# EAGLE board 010rele quad (EAGLE 5.11)
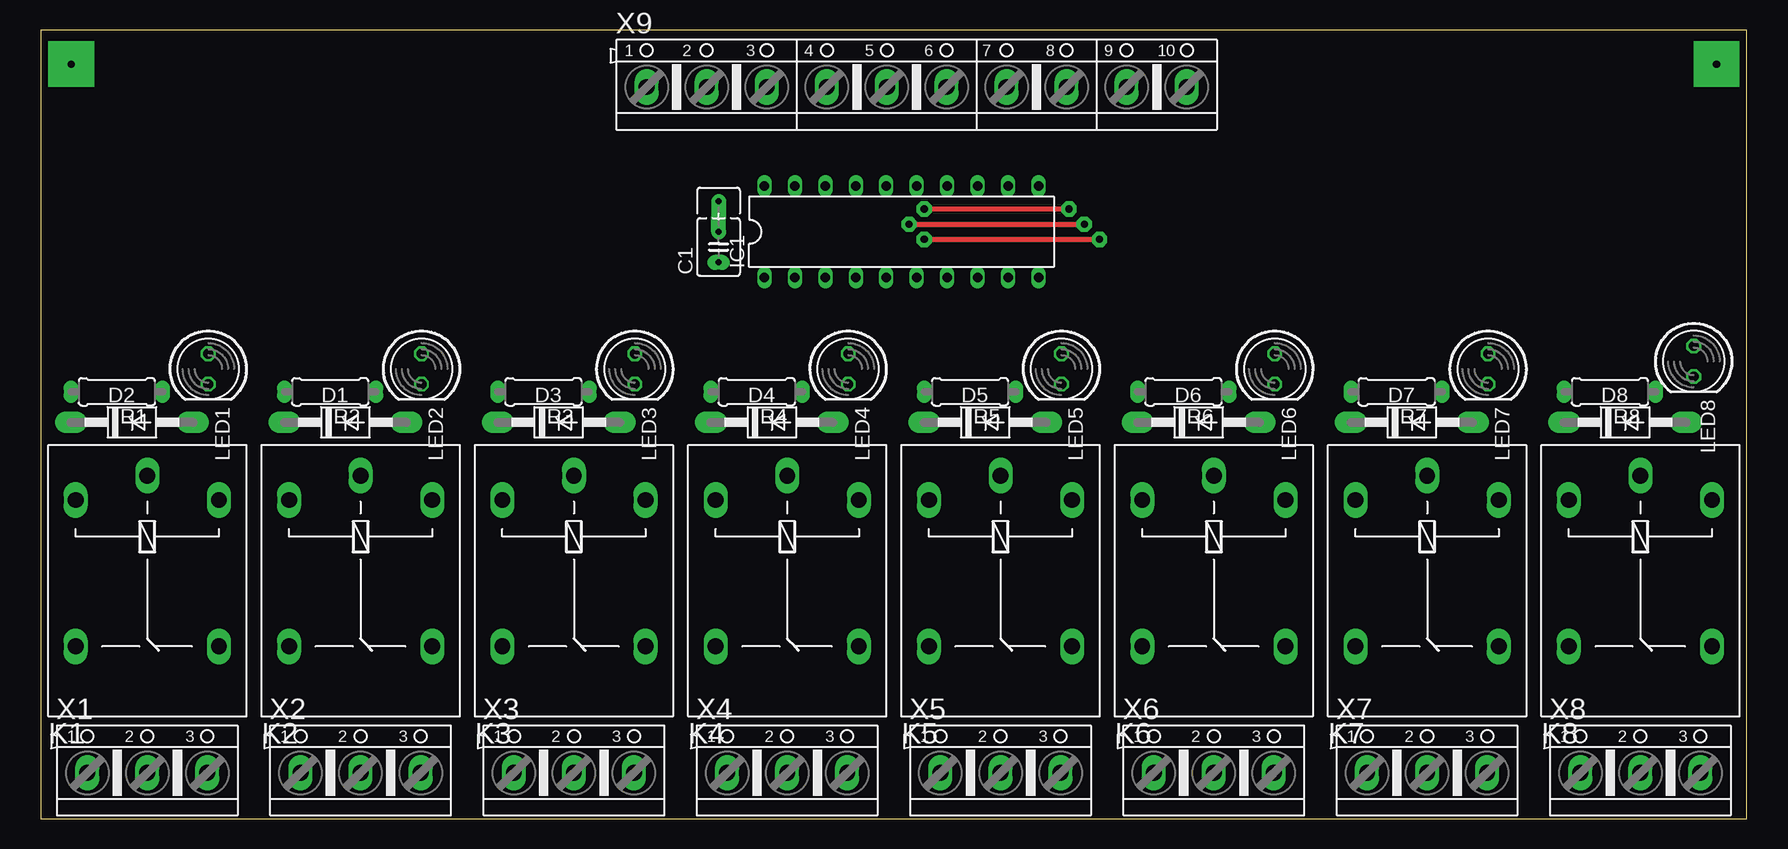
[diagram p0: board, top side]
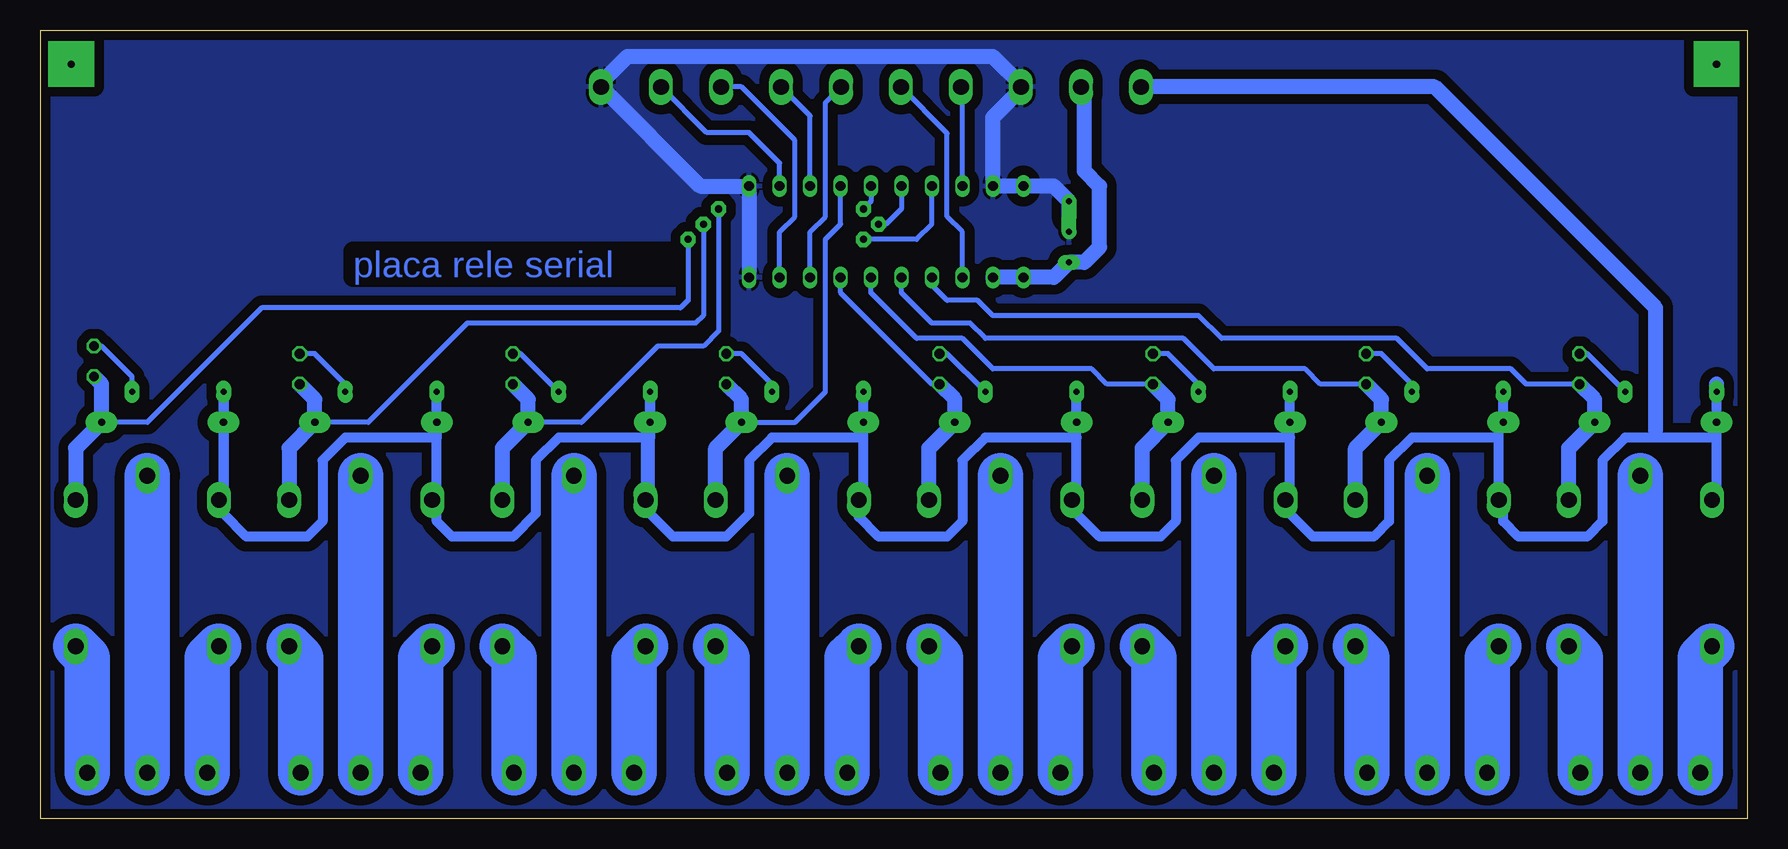
[diagram p1: board, bottom side, seen from below]

Size 142.22 x 65.71 mm. Coordinates in mm from the lower left corner, seen from the top.
Outline: 0,0 142.22,0 142.22,65.71 0,65.71 0,0
Copper layers (1*16): Top 0.035mm / dielectric 1.5mm / Bottom 0.035mm
Design rules "MUITO BOM": minimum track width 20mil, minimum drill 24mil, track to track 12mil, track to pad 12mil, pad to pad 12mil, via to via 12mil, smd to smd 12mil, copper to edge 8mil, drill to drill 8mil, minimum pad ring 8mil, minimum via ring 8mil, stop-mask expansion 4mil, vias tented up to drill 0mil, thermal gap 10mil

## Footprints (pad centres in the part's own frame; a part is rotated, then mirrored left to right if it is on the bottom)
C025_050-035X075 = drill 0.5 pad 1.27 long: 1 -1.27,0 | drill 0.5 pad 1.27 offset: 2 1.27,0; 3 3.81,0
DO41-10 = drill 0.6 pad 1.778 long: A 5.08,0; C -5.08,0
DIL20 = drill 0.813 long: 1 -11.43,-3.81; 2 -8.89,-3.81; 3 -6.35,-3.81; 4 -3.81,-3.81; 5 -1.27,-3.81; 6 1.27,-3.81; 7 3.81,-3.81; 8 6.35,-3.81; 9 8.89,-3.81; 10 11.43,-3.81; 11 11.43,3.81; 12 8.89,3.81; 13 6.35,3.81; 14 3.81,3.81; 15 1.27,3.81; 16 -1.27,3.81; 17 -3.81,3.81; 18 -6.35,3.81; 19 -8.89,3.81; 20 -11.43,3.81
G5LE = drill 1.321 long: 1 -7.493,-5.969; 2 -7.493,5.969; O 4.699,5.969; P -9.525,0; S 4.699,-5.969
LED5MM = drill 0.813 octagon: A -1.27,0; K 1.27,0
0207/7 = drill 0.5 pad 1.27 long: 1 -3.81,0; 2 3.81,0
AK500/3 = drill 1.321 long: 1 -5.004,0; 2 0,0; 3 5.004,0
AK500/10 = drill 1.321 long: 1 -22.504,0; 2 -17.501,0; 3 -12.497,0; 4 -7.493,0; 5 -2.489,0; 6 2.489,0; 7 7.493,0; 8 12.497,0; 9 17.501,0; 10 22.504,0

## Placement (x,y rotation side)
C1  100NF  [C025_050-035X075]  56.52,47.62 90 top
D1  1N4004  [DO41-10]  25.4,33.02 0 top
D2  1N4004  [DO41-10]  7.62,33.02 0 top
D3  1N4004  [DO41-10]  43.18,33.02 0 top
D4  1N4004  [DO41-10]  60.96,33.02 0 top
D5  1N4004  [DO41-10]  78.74,33.02 0 top
D6  1N4004  [DO41-10]  96.52,33.02 0 top
D7  1N4004  [DO41-10]  114.3,33.02 0 top
D8  1N4004  [DO41-10]  132.08,33.02 0 top
IC1  TPIC6B596N  [DIL20]  71.75,48.9 0 top
K1  G5L  [G5LE]  8.89,19.05 270 top
K2  G5L  [G5LE]  26.67,19.05 270 top
K3  G5L  [G5LE]  44.45,19.05 270 top
K4  G5L  [G5LE]  62.23,19.05 270 top
K5  G5L  [G5LE]  80.01,19.05 270 top
K6  G5L  [G5LE]  97.79,19.05 270 top
K7  G5L  [G5LE]  115.57,19.05 270 top
K8  G5L  [G5LE]  133.35,19.05 270 top
LED1  [LED5MM]  13.97,37.47 270 top
LED2  [LED5MM]  31.75,37.47 270 top
LED3  [LED5MM]  49.53,37.47 270 top
LED4  [LED5MM]  67.31,37.47 270 top
LED5  [LED5MM]  85.09,37.47 270 top
LED6  [LED5MM]  102.87,37.47 270 top
LED7  [LED5MM]  120.65,37.47 270 top
LED8  [LED5MM]  137.79,38.1 270 top
R1  [0207/7]  6.35,35.56 180 top
R2  [0207/7]  24.13,35.56 180 top
R3  [0207/7]  41.91,35.56 180 top
R4  [0207/7]  59.69,35.56 180 top
R5  [0207/7]  77.47,35.56 180 top
R6  [0207/7]  95.25,35.56 180 top
R7  [0207/7]  113.03,35.56 180 top
R8  [0207/7]  130.81,35.56 180 top
X1  [AK500/3]  8.89,3.81 0 top
X2  [AK500/3]  26.67,3.81 0 top
X3  [AK500/3]  44.45,3.81 0 top
X4  [AK500/3]  62.23,3.81 0 top
X5  [AK500/3]  80.01,3.81 0 top
X6  [AK500/3]  97.79,3.81 0 top
X7  [AK500/3]  115.57,3.81 0 top
X8  [AK500/3]  133.35,3.81 0 top
X9  [AK500/10]  73.03,60.96 0 top

## Library data of the parts
C1 R1-R8 = rcl
D1-D8 = diode
IC1 = tpic
K1-K8 = relay; OC_FARNELL: unknown; OC_NEWARK: unknown
LED1-LED8 = led
X1-X9 = con-ptr500; OC_FARNELL: unknown; OC_NEWARK: unknown

## Nets
5V: C1.1 IC1.2 X9.2
12V: D1.C D2.C D3.C D4.C D5.C D6.C D7.C D8.C K1.1 K2.1 K3.1 K4.1 K5.1 K6.1 K7.1 K8.1 R1.2 R2.2 R3.2 R4.2 R5.2 R6.2 R7.2 R8.2 X9.1
GND: C1.2 IC1.10 IC1.11 IC1.19 X9.3 X9.10
N$1: D2.A IC1.4 K1.2 LED1.K
N$2: D1.A IC1.5 K2.2 LED2.K
N$3: LED8.A R8.1
N$4: IC1.18 X9.4
N$6: IC1.3 X9.5
N$7: LED6.A R6.1
N$9: IC1.8 X9.6
N$10: LED5.A R5.1
N$11: D6.A IC1.15 K6.2 LED6.K
N$12: IC1.13 X9.7
N$13: D8.A IC1.17 K8.2 LED8.K
N$14: IC1.12 X9.9
N$15: D4.A IC1.7 K4.2 LED4.K
N$16: LED4.A R4.1
N$17: D5.A IC1.14 K5.2 LED5.K
N$19: IC1.9 X9.8
N$20: LED3.A R3.1
N$21: D7.A IC1.16 K7.2 LED7.K
N$22: LED2.A R2.1
N$23: LED7.A R7.1
N$24: LED1.A R1.1
N$25: D3.A IC1.6 K3.2 LED3.K
N$29: K1.O X1.3
N$30: K1.P X1.2
N$31: K1.S X1.1
N$32: K2.O X2.3
N$33: K2.P X2.2
N$34: K2.S X2.1
N$35: K3.O X3.3
N$36: K3.P X3.2
N$37: K3.S X3.1
N$38: K4.O X4.3
N$39: K4.P X4.2
N$40: K4.S X4.1
N$41: K5.O X5.3
N$42: K5.P X5.2
N$43: K5.S X5.1
N$44: K6.O X6.3
N$45: K6.P X6.2
N$46: K6.S X6.1
N$47: K7.O X7.3
N$48: K7.P X7.2
N$49: K7.S X7.1
N$50: K8.O X8.3
N$51: K8.P X8.2
N$52: K8.S X8.1

## Tracks (layer width: path | path; a pad name or v marks a point on that pad's centre or on a via)
5V
  Bottom 1.27: IC1.2 57.78,45.09 C1.1 55.24,46.35 53.98,47.62 53.98,52.7 55.24,53.98 55.24,60.68 X9.2
12V
  Bottom 0.406: 7.62,31.75 7.62,32.38
  Bottom 0.813: 2.54,31.75 2.54,26.92 K1.1 | 2.54,31.75 D2.C R1.2 | K8.1 127,26.92 D8.C R8.2 127,25.4 125.09,23.5 120.02,23.5 118.75,24.77 118.75,29.84 116.84,31.75 109.22,31.75 D7.C | D7.C R7.2 | 109.22,26.92 D7.C | 109.22,26.92 K7.1 | D6.C R6.2 91.44,25.4 89.53,23.5 85.09,23.5 83.19,25.4 83.19,29.84 81.28,31.75 73.66,31.75 | 2.54,31.75 7.62,31.75 10.16,31.75 12.06,29.84 12.06,24.77 13.34,23.5 19.05,23.5 20.32,24.77 20.32,26.16 K2.1 20.7,31.75 | 20.7,31.75 20.7,32.64 D1.C R2.2 | R3.2 D3.C 38.1,31.75 | 38.1,26.92 38.1,31.75 | 38.1,26.92 K3.1 | 38.1,26.92 38.1,25.4 36.2,23.5 31.11,23.5 29.84,24.77 29.84,29.84 27.94,31.75 20.7,31.75 | 38.1,31.75 45.72,31.75 47.62,29.84 47.62,24.77 48.9,23.5 53.98,23.5 56.26,25.78 K4.1 55.88,26.92 55.88,31.75 | 55.88,31.75 63.5,31.75 65.41,29.84 65.41,24.77 66.67,23.5 72.39,23.5 74.04,25.15 K5.1 73.66,26.92 73.66,31.75 | R4.2 D4.C 55.88,31.75 | 109.22,26.92 109.22,24.77 107.95,23.5 102.87,23.5 100.97,25.4 100.97,29.84 99.06,31.75 91.44,31.75 D6.C | K6.1 91.82,32.64 D6.C | R5.2 D5.C 73.66,31.75
  Bottom 1.27: R1.2 2.54,36.2 | X9.1 26.04,60.96 7.62,42.55 7.62,32.38
GND
  Bottom 0.406: IC1.19 62.87,58.62 X9.3
  Bottom 0.508: X9.10 95.57,60.96 95.73,61.12
  Bottom 1.27: 95.89,60.96 95.73,61.12 93.34,63.5 62.87,63.5 60.33,60.96 62.87,58.42 IC1.19 57.78,52.7 56.52,51.44 C1.2 | IC1.10 IC1.11 87.27,52.7 X9.10
  pour Bottom (isolate 0.813): 0,66.04 142.24,66.04 142.24,0 0,0
N$1
  Bottom 0.406: LED1.K 18.41,36.2 19.68,37.47 26.67,37.47 29.21,40.01 43.81,40.01 45.72,41.91 62.87,41.91 64.14,43.18 66.67,43.18 67.94,44.45 IC1.4
  Bottom 1.27: K1.2 14.86,30.86 D2.A 12.7,34.92 LED1.K
N$2
  Bottom 0.406: LED2.K 35.56,36.2 36.83,37.47 44.45,37.47 46.99,40.01 63.5,40.01 64.77,41.27 67.94,41.27 70.48,43.81 IC1.5
  Bottom 1.27: K2.2 32.64,30.86 D1.A 30.48,34.92 LED2.K
N$3
  Bottom 0.406: R8.1 134.62,36.83 137.16,39.37 LED8.A
N$4
  Bottom 0.406: IC1.18 65.41,60.83 X9.4
N$6
  Bottom 0.406: IC1.3 65.41,48.9 66.67,50.16 66.67,57.1 X9.5
N$7
  Bottom 0.406: R6.1 102.23,38.73 LED6.A
N$9
  Bottom 0.406: IC1.8 78.11,48.9 76.83,50.16 76.83,59.64 X9.6
N$10
  Bottom 0.406: R5.1 81.28,36.2 83.82,38.73 LED5.A
N$11  (via drill 0.6 pad 1.27)
  Top 0.406: v73.66,50.8 v85.72,50.8
  Bottom 0.406: IC1.15 73.03,51.44 v73.66,50.8 | D6.A 97.16,33.02 90.81,39.37 87,39.37 85.72,40.64 v85.72,50.8
  Bottom 1.27: K6.2 103.76,30.86 D6.A 101.6,34.92 LED6.K
N$12
  Bottom 0.406: IC1.13 78.11,58.55 X9.7
N$13  (via drill 0.6 pad 1.27)
  Top 0.406: v73.66,48.26 v88.27,48.26
  Bottom 0.406: D8.A 133.35,33.02 123.83,42.55 88.9,42.55 88.27,43.18 v88.27,48.26 | v73.66,48.26 69.22,48.26 67.94,49.53 IC1.17
  Bottom 1.27: K8.2 139.32,30.86 D8.A 137.16,36.2 LED8.K
N$14
  Bottom 0.406: IC1.12 80.64,54.61 83.19,57.15 86.72,57.15 X9.9
N$15
  Bottom 0.406: LED4.K 67.94,36.2 75.56,43.81 IC1.7
  Bottom 1.27: K4.2 68.2,30.86 D4.A 66.04,34.92 LED4.K
N$16
  Bottom 0.406: R4.1 66.67,38.73 LED4.A
N$17
  Bottom 0.406: IC1.14 75.56,49.53 76.83,48.26 76.83,35.56 79.38,33.02 D5.A
  Bottom 1.27: K5.2 85.98,30.86 D5.A 83.82,34.92 LED5.K
N$19
  Bottom 0.406: IC1.9 80.64,48.9 79.38,50.16 79.38,56.52 83.82,60.96 X9.8
N$20
  Bottom 0.406: R3.1 45.72,36.2 48.26,38.73 LED3.A
N$21  (via drill 0.6 pad 1.27)
  Top 0.406: v72.39,49.53 v87,49.53
  Bottom 0.406: D7.A 114.94,33.02 106.68,41.27 87.63,41.27 87,41.91 v87,49.53 | v72.39,49.53 71.75,49.53 70.48,50.8 IC1.16
  Bottom 1.27: K7.2 121.54,30.86 D7.A 119.38,34.92 LED7.K
N$22
  Bottom 0.406: R2.1 27.94,36.2 30.48,38.73 LED2.A
N$23
  Bottom 0.406: R7.1 116.84,36.2 119.38,38.73 LED7.A
N$24
  Bottom 0.406: R1.1 13.34,38.73 LED1.A
N$25
  Bottom 0.406: LED3.K 53.34,36.2 54.61,37.47 62.87,37.47 65.41,40.01 69.22,40.01 73.03,43.81 IC1.6
  Bottom 1.27: K3.2 50.42,30.86 D3.A 48.26,34.92 LED3.K
N$26  (via drill 0.6 pad 3.81)
  other vias: 2.54,62.87
N$27  (via drill 0.6 pad 3.81)
  other vias: 139.7,62.87
N$29
  Bottom 3.81: X1.3 13.89,13.39 K1.O
N$30
  Bottom 3.81: X1.2 K1.P
N$31
  Bottom 3.81: X1.1 3.89,13.39 K1.S
N$32
  Bottom 3.81: X2.3 31.67,13.39 K2.O
N$33
  Bottom 3.81: X2.2 K2.P
N$34
  Bottom 3.81: X2.1 21.67,13.39 K2.S
N$35
  Bottom 3.81: X3.3 49.45,13.39 K3.O
N$36
  Bottom 3.81: X3.2 K3.P
N$37
  Bottom 3.81: X3.1 39.45,13.39 K3.S
N$38
  Bottom 3.81: X4.3 67.23,13.39 K4.O
N$39
  Bottom 3.81: X4.2 K4.P
N$40
  Bottom 3.81: X4.1 57.23,13.39 K4.S
N$41
  Bottom 3.81: X5.3 85.01,13.39 K5.O
N$42
  Bottom 3.81: X5.2 K5.P
N$43
  Bottom 3.81: X5.1 75.01,13.39 K5.S
N$44
  Bottom 3.81: X6.3 102.79,13.39 K6.O
N$45
  Bottom 3.81: X6.2 K6.P
N$46
  Bottom 3.81: X6.1 92.79,13.39 K6.S
N$47
  Bottom 3.81: X7.3 120.57,13.39 K7.O
N$48
  Bottom 3.81: X7.2 K7.P
N$49
  Bottom 3.81: X7.1 110.57,13.39 K7.S
N$50
  Bottom 3.81: X8.3 138.35,13.39 K8.O
N$51
  Bottom 3.81: X8.2 K8.P
N$52
  Bottom 3.81: X8.1 128.35,13.39 K8.S

## Text on the board
Bottom: placa rele serial